# Allegro board PCB0389.brd
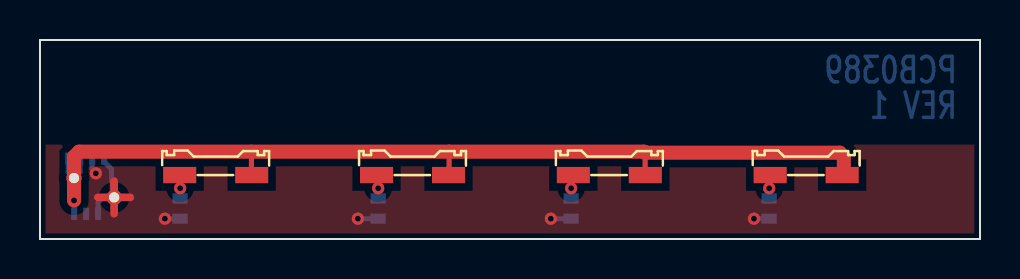
[diagram p0: board, top side]
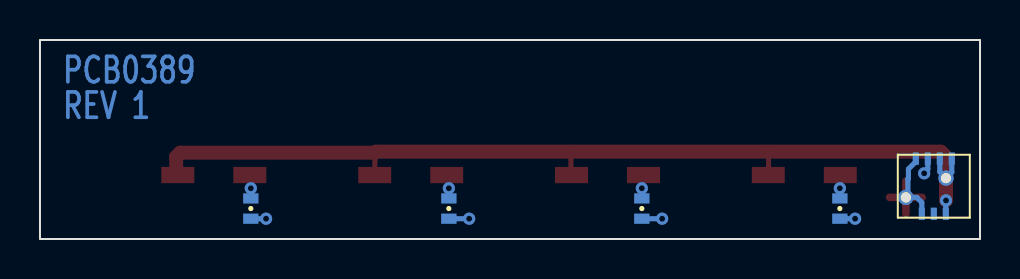
[diagram p1: board, bottom side, seen from below]

Outline 47.02 x 9.96 mm; copper layers: TOP, BOTTOM. Coordinates in mm from the lower left corner of the outline.
Outline path: rectangle 0,0 47.02,9.96

## Placement (name value [footprint] x y rotation side)
D1  LTW-006DCG-E2  [LED_LTW006DCG]  8.79 3.2 180 top
D2  LTW-006DCG-E2  [LED_LTW006DCG]  18.63 3.2 180 top
D3  LTW-006DCG-E2  [LED_LTW006DCG]  28.48 3.2 180 top
D4  LTW-006DCG-E2  [LED_LTW006DCG]  38.32 3.2 180 top
J1  AYF330735 PAN  [CON_AYF3307]  2.31 2.64 270 bottom
R1  4R99  [R0402]  7.01 1.52 90 bottom
R2  4R99  [R0402]  16.92 1.52 90 bottom
R3  4R99  [R0402]  26.57 1.52 90 bottom
R4  4R99  [R0402]  36.47 1.52 90 bottom
TP1  TPAD_020  [TP]  1.7 3.05 0 top
TP2  TPAD_020  [TP]  3.71 2.08 0 top

## Library data of the parts
D1-D4 = LED
J1 = HEADER_7
R1-R4 = RES
TP1 TP2 = TESTLOOP

## Footprints (pads in the part's own frame, mm; a bottom-side part is the same pattern mirrored in y, then rotated)
CON_AYF3307
  rect 0.61x0.305 smd: 1(-1.38,0.9) 2(1.38,0.6) 3(-1.38,0.3) 4(1.38,0) 5(-1.38,-0.3) 6(1.38,-0.6) 7(-1.38,-0.9)
LED_LTW006DCG
  rect 1.651x0.813 smd: 1(-1.8,0) 2(1.8,0)
R0402
  rect 0.508x0.762 smd: 1(-0.508,0) 2(0.508,0)
TP
  round 0.762 hole 0.508: 1(0,0)

## Nets
GND: J1.5 J1.6 J1.7 R1.1 R2.1 R3.1 R4.1 TP2.1(PIN1)
N17188037: D1.1(ANODE) D2.1(ANODE) D3.1(ANODE) D4.1(ANODE) J1.1 J1.2 J1.3 TP1.1(PIN1)
N171879541: D1.2(CATHODE) R1.2
N171879621: D2.2(CATHODE) R2.2
N171879701: D3.2(CATHODE) R3.2
N171879781: D4.2(CATHODE) R4.2

Pads without a net: J1 4

## Via types
v1: diameter 0.61, hole 0.3, TOP to BOTTOM, 10 vias

## Routing (per net, layer and track width the routed paths; a pad name or vN(x,y) marks a point on that pad's centre or on a via; arc(x,y) is an arc through that point)
GND: length 11.2
  TOP w0.381: 3.71,1.27 TP2.1 ; TP2.1 2.9,2.08 ; TP2.1 3.71,2.89 ; TP2.1 4.52,2.08
  BOTTOM w0.254: R2.1 v1(15.9,1.02) ; J1.5 2.61,3.48 2.79,3.3 v1(2.79,3.29) ; J1.6 2.91,1.83 3.17,2.08 TP2.1 3.61,2.18 3.61,3 3.58,3.02 3.58,3.5 3.21,3.87 J1.7 ; R1.1 v1(6.25,1.02) ; R3.1 v1(25.55,1.02) ; R4.1 v1(35.71,1.02)
N17188037: length 48.2
  TOP w0.254: 30.27,4.32 30.27,3.21 D3.1 ; D2.1 20.46,3.23 20.46,4.37 ; D1.1 10.58,3.21 10.58,4.37
  TOP w0.7: D4.1 40.21,3.28 40.21,4.11 40.01,4.32 30.27,4.32 30.22,4.37 1.96,4.37 1.7,4.11 TP1.1 v1(1.7,1.93)
  BOTTOM w0.254: J1.1 1.41,3.34 TP1.1 2.01,3.36 J1.3 ; v1(1.7,1.93) 1.71,1.93 J1.2
N171879541: length 1.2
  TOP w0.254: v1(7.01,2.54) 7.01,3.18 D1.2
  BOTTOM w0.254: R1.2 v1(7.01,2.54)
N171879621: length 1.2
  TOP w0.254: D2.2 16.92,3.12 v1(16.92,2.54)
  BOTTOM w0.254: R2.2 v1(16.92,2.54)
N171879701: length 1.2
  TOP w0.254: v1(26.57,2.54) 26.57,3.09 D3.2
  BOTTOM w0.254: R3.2 v1(26.57,2.54)
N171879781: length 1.2
  TOP w0.254: v1(36.47,2.54) 36.47,3.15 D4.2
  BOTTOM w0.254: R4.2 v1(36.47,2.54)

## Copper pours and planes (outline as drawn; the poured copper is in the pictures)
GND on TOP: 0.28,4.72 0.28,0.28 46.74,0.28 46.74,4.72

## Text on the board
BOTTOM: PCB0389 | REV 1
DRAWING_FORMAT_FAB: 4 | UNLESS OTHERWISE SPECIFIED | TOLERANCES ARE: | DIMENSIONS ARE IN INCHES | FRACTIONS | MATERIAL | FINISH | +/-1/64 | DO NOT SCALE DRAWING | .XX+/-.01 | .XXX+/-.005 | DECIMALS | ANGLES | +/-5 | ALAN ROBERTSON | CONTRACT NO. | DRAWN | CHECKED | ENG. | ISSUED | 3 | APPROVALS | 06/10/2015 | DATE | SCALE | SIZE | D | 1 : 1 | FSCM NO. | FABRICATION DRAWING | FCS NO. | 2 | XXXXXXFX | DWG NO. | SHEET        OF | 1 | REV. | A | SEE NOTES | TOUCHSTONE TECHNOLOGY, INC | 350 MILE CROSSING BLVD. | ROCHESTER, NY 14624 | PCB0389 | NOTES (UNLESS OTHERWISE SPECIFIED) | 1. MATERIAL: | 2. DRILLING ROUTING AND SCORING: | 3. PLATING | 4. MARKING | 5. FINAL FABRICATION | 6. IMPEDANCE CONTROL | 8. PANELIZATION. | 7. MIN TRACE IS 7.00 MIL MIN SPACE IS 8.00 MIL. | 11 | 9. CHECKPLOTS REQUIRED | 10. PLEASE SEND STENCIL INFORMATION WITH CHECKPLOTS | COPPER LAYERS WITH 0.125" SOLDER MASK CLEARING. | 8.3 SCRAP RAILS TO INCLUDE 1 0.75" SQUARE FIDUCIAL ON TOP & BOTTOM (AS REQ'D) | COPPER LAYERS WITH 0.80" SOLDER MASK CLEARING. | 8.6 PLEASE ARRAY AS BEST DETERMINED WITHIN A MAXIMUM 10"X 10" OVERALL PANEL SIZE | 8.5 TOOLING HOLES ARE NOT REQUIRED | 8.1 PLEASE INCLUDE 2(min) 1/2" SCRAP RAILS ALONG THE LONGEST EDGES | 8.2 SCRAP RAILS TO INCLUDE 3 0.080" CIRCULAR FIDUCIALS ON TOP & BOTTOM (AS REQ'D) | 8.4 SCRAP RAILS TO INCLUDE DIRECTIONAL ARROWS ON TOP & BOTTOM (AS REQ'D) | WITH NO MASK CLEARING. | 6.1 NA | E. PLEASE USE PROVIDED NETLIST TO GENERATE ELECTRICAL TEST PROGRAMS | D. ALL VIAS TO BE TENTED WITH SOLDERMASK | E. FINAL TEST AND INSPECTION PER IPC-6012 LATEST REVISION. | A. LAMINATE MATERIAL SHALL MEET THE REQUIREMENTS OF IPC 4101. | B. EPOXY GLASS LAMINATE AND PREPREG, TYPE FR-4. MINIMUM Tg SHALL BE 170C. | C. USE HTE COPPER,0.5OZ COPPER FOIL FOR EXTERNAL LAYERS AND 1 OZ COPPER | D. OVERALL THICKNESS IS .0327 +/- 10%, UNLESS OTHERWISE | E. FABRICATOR TO ADJUST DIELECTRIC TO MEET IMPEDANCE AND OVERALL | A.UNMARKED HOLE SYMBOLS NOT SHOWN, SEE HOLE SCHEDULE. | B.DIAMETERS IN DRILL TABLE ARE FINISHED HOLE SIZES +/- .003" | C.TEARDROP ON ENTRY OF VIA ON EVERY TRACE LAYER. | A. COPPER PLATING IN THRU-HOLES .001" AVERAGE PER IPC 6012. | A. NO SILK LAYER REQUIRED | B. FABRICATOR TO ETCH DATE CODE AND LOGO ON SECONDARY SIDE | A. SOLDERMASK OVER BARE COPPER ON BOTH SIDES, USING LIQUID | B. MAXIMUM WARP OR TWIST SHALL NOT EXCEED .007" IN/IN. | C. SURFACE FINISH IS IMMERSION AU | D.SEE SCORE DETAIL FOR DEPTH AND REGISTRATION. | 8.4 | 8.2 | EXCEPT TEST VIAS. | FOIL FOR INTERNAL LAYERS, UNLESS OTHERWISE SPECIFIED IN STACKUP VIEW. | SPECIFIED IN STACKUP VIEW. | THICKNESS TOLERANCE. | TOLERANCE UNLESS OTHERWISE SPECIFIED IN DRILL TABLE. | . | PHOTO IMAGEABLE (LPI). | 0.50 | ARRAY DETAIL | 10 | 8.3 | 9 | 8 | 7 | 6 | 5 | REF SCORE CHART | NOTE: TOP TO BOTTOM OFFSET SHALL NOT EXCEED 0.003" [0.07mm] | TOP COPPER | BOTTOM COPPER | THICKNESS (1.D) | 0.020"[0.51mm] | 0.031"[0.79mm] | 0.062"[1.60mm] | 0.078"[2.00mm] | 0.093"[2.40mm] | 0.125"[3.18mm] | SCORE CHART | LAYER 1 | LAYER 4 | 30.0 | 0.030 +/- 0.005" | WEB THICKNESS +/-0.003" | 0.008"[0.20mm] | 0.009"[0.23mm] | 0.015"[0.38mm] | 0.016"[0.41mm] | 0.020"[0.46mm] | 0.022"[0.51mm] | REF 1.D | 0.5 OZ | G | F | E | C | B | .0327 | REF. | 2.D SCORE DETAIL | 1.D LAYER DETAIL: | CONSTRUCTION LAMINATE THICKNESS | AT VENDORS' DISCRETION | RoHS Compliant
User.9: FIGURE | SIZE | 0.2997 | 0.508 | DRILL CHART: TOP to BOTTOM | ALL UNITS ARE IN MILLIMETERS | TOLERANCE | +0.0762/-0.0762 | PLATED | QTY | 10 | 2
